# Altium PCB sdp_accelPCB.PcbDoc
Units mil, origin at the board's own origin, x right, y up, seen from the top; angles counter-clockwise.
Board outline 6000 x 4000 mil, 2 copper layers (Top Layer, Bottom Layer); 11 components, 6 nets, 135 pads, 4 vias.
Unrouted connection lines stored in the file: 37.
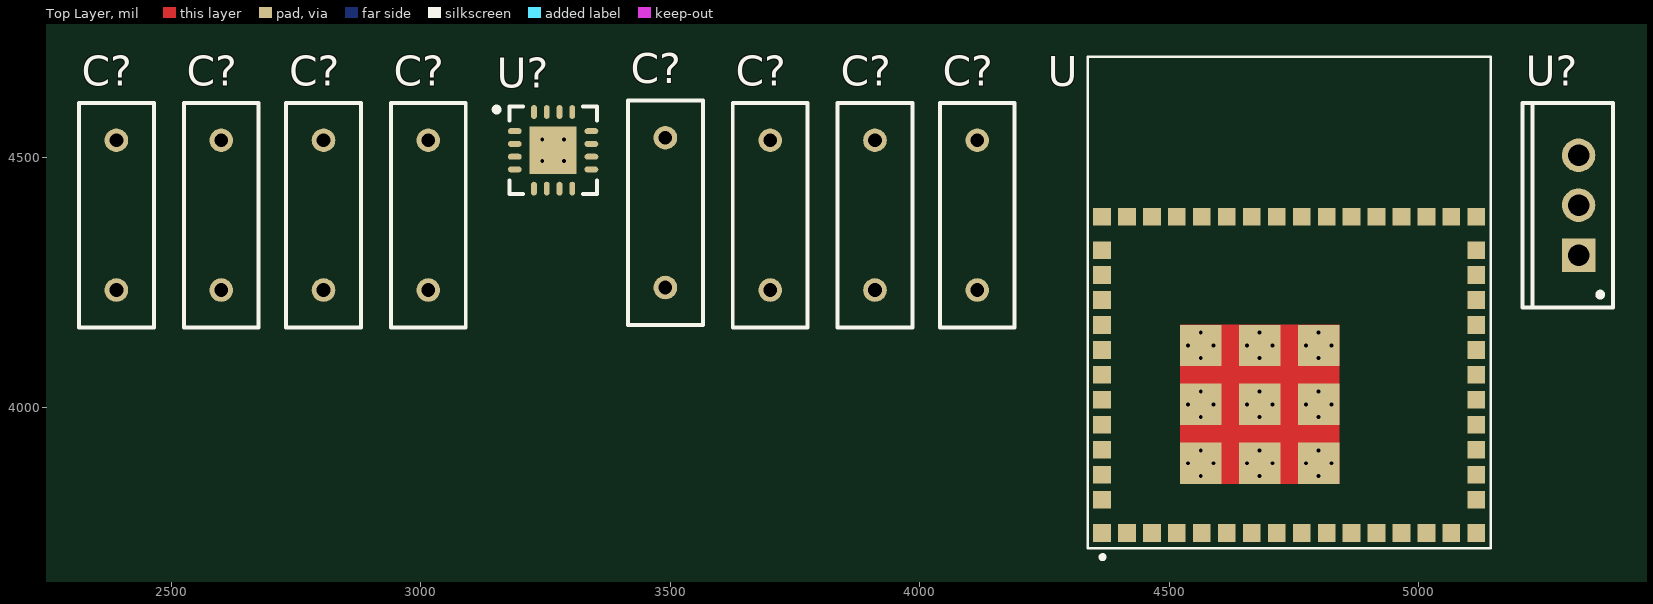
[diagram p0: Top Layer view]
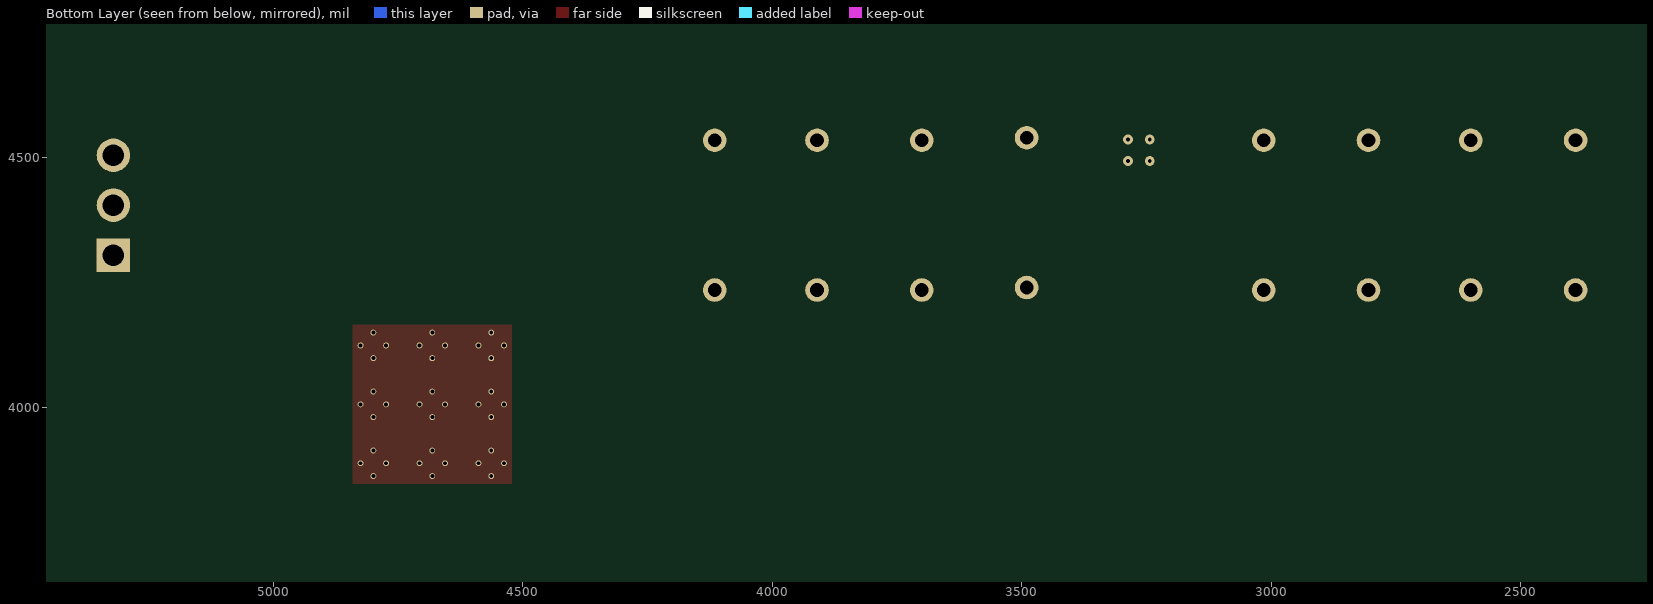
[diagram p1: Bottom Layer view, seen from below]

## Layer stack, top to bottom
Top Solder: solder mask 0.4, Solder Resist, Dk 3.5
Top Layer: signal copper 1.4
Dielectric 1: dielectric 12.6, FR-4, Dk 4.8
Bottom Layer: signal copper 1.4
Bottom Solder: solder mask 0.4, Solder Resist, Dk 3.5

## Board outline
1000,1000 7000,1000 7000,5000 1000,5000

## Design rules (kind name [scope] priority, off if disabled: settings)
Clearance [All] p1: gap=10 ignorepadtopadclearanceinfootprint=FALSE except(0: Arc-Hole Track-Hole SMDPad-Hole THPad-Hole Via-Hole Fill-Hole Poly-Hole Region-Hole Text-Hole)
PolygonConnect [All] p1: connectstyle=Relief reliefconductorwidth=10 reliefentries=4 polygonreliefangle="90 Angle" airgapwidth=10
RoomDefinition sdp_accel [InComponentClass('sdp_accel')] p1: confinementstyle=ConfineIn formatcopy=TRUE lockcomponents=FALSE outline 2305,3685 5400,3685 5400,4720 2305,4720
RoutingVias [All] p1: holewidth=28 width=50 viastyle="Through Hole" minholewidth=28 minwidth=50 maxholewidth=28 maxwidth=50
SolderMaskExpansion [All] p1: expansion=4 istentingtop=FALSE
Width [All] p1: maxlimit=10 minlimit=10 preferedwidth=10
30 further rules are at their usual default settings.

## Classes and differential pairs
component class sdp_accel: C? U U?

## Components (designator, comment, footprint, x,y, rotation, side; value= is the part's Value field where it differs from the comment)
C? "Cap" RAD-0.3 3910,4385 r90 top value=0.1uF
C? "Cap" RAD-0.3 3015,4385 r90 top value=3nF
C? "Cap" RAD-0.3 2600,4385 r90 top value=10nF
C? "Cap" RAD-0.3 3490,4390 r90 top value=100nF
C? "Cap" RAD-0.3 4115,4385 r90 top value=2.2uF
C? "Cap" RAD-0.3 3700,4385 r90 top value=100nF
C? "Cap" RAD-0.3 2390,4385 r90 top value=100nF
C? "Cap" RAD-0.3 2805,4385 r90 top value=3nF
U "CC3220MODASF12MONR" XCVR_CC3220MODASF12MONR 4740,4065 r90 top
U? "LF33ABV" TO220 5320,4405 r90 top
U? "ADXL335BCPZ" ADI-CP-16-14_L 3265,4515 r0 top

## Footprints (in the part's own frame and the unit in brackets; to place one, negate y for a bottom-side part, rotate by r counter-clockwise, add the part's x,y. Pads: shape width x height; smd on the part's side, far side on the other; paste and mask are expansions set on the pad)
ADI-CP-16-14_L [mm] "QFN, 16-Leads, Body 4x4mm, Pitch 0.65mm, Thermal Pad 2.4x2.4mm, IPC High Density"
  oval 0.7x0.3 smd: 1(-1.95,0.975) 2(-1.95,0.325) 3(-1.95,-0.325) 4(-1.95,-0.975) 9(1.95,-0.975) 10(1.95,-0.325) 11(1.95,0.325) 12(1.95,0.975)
  oval 0.3x0.7 smd: 5(-0.975,-1.95) 6(-0.325,-1.95) 7(0.325,-1.95) 8(0.975,-1.95) 13(0.975,1.95) 14(0.325,1.95) 15(-0.325,1.95) 16(-0.975,1.95)
  rect 2.4x2.4 smd: 17(0,0)
  silkscreen extent -3,-2.22 2.22,2.23, body extent -2.08,-2.07 2.07,2.08, height 1.5
RAD-0.3 [mm] "Radial Cap, Thru-Hole; 2 Leads; 0.3 in Pin Spacing"
  round 1.2 hole 0.7: 1(-3.81,0) 2(3.81,0)
  silkscreen extent -5.71,-1.91 5.71,1.91
TO220 [mm] "TO, Thru-Hole, Vertical, Heatsink Mounted; 3 In-Line Leads; Pitch 2.54 mm"
  rect 1.7x1.7 hole 1.1: 1(-2.54,0)
  round 1.7 hole 1.1: 2(0,0) 3(2.54,0)
  silkscreen extent -5.2,-1.75 5.2,2.85, body extent -5.25,-1.8 5.25,2.9, height 19.7
XCVR_CC3220MODASF12MONR [mm]
  rect 0.9x0.9 smd paste-1 mask+0: 1(-8.05,9.525) 2(-8.05,8.255) 3(-8.05,6.985) 4(-8.05,5.715) 5(-8.05,4.445) 6(-8.05,3.175) 7(-8.05,1.905) 8(-8.05,0.635) 9(-8.05,-0.635) 10(-8.05,-1.905) 11(-8.05,-3.175) 12(-8.05,-4.445) 13(-8.05,-5.715) 14(-8.05,-6.985) 15(-8.05,-8.255) 16(-8.05,-9.525) 17(-6.35,-9.524) 18(-5.08,-9.524) 19(-3.81,-9.524) 20(-2.54,-9.524) 21(-1.27,-9.524) 22(0,-9.524) 23(1.27,-9.524) 24(2.54,-9.524) 25(3.81,-9.524) 26(5.08,-9.524) 27(6.35,-9.524) 28(8.05,-9.525) 29(8.05,-8.255) 30(8.05,-6.985) 31(8.05,-5.715) 32(8.05,-4.445) 33(8.05,-3.175) 34(8.05,-1.905) 35(8.05,-0.635) 36(8.05,0.635) 37(8.05,1.905) 38(8.05,3.175) 39(8.05,4.445) 40(8.05,5.715) 41(8.05,6.985) 42(8.05,8.255) 43(8.05,9.525) 44(6.35,9.524) 45(5.08,9.524) 46(3.81,9.524) 47(2.54,9.524) 48(1.27,9.524) 49(0,9.524) 50(-1.27,9.524) 51(-2.54,9.524) 52(-3.81,9.524) 53(-5.08,9.524) 54(-6.35,9.524)
  rect 2.1x2.1 smd paste-2 mask+0: 55(-4.5,4.5) 56(-4.5,1.5) 57(-4.5,-1.5) 58(-1.5,4.5) 59(-1.5,1.5) 60(-1.5,-1.5) 61(1.5,4.5) 62(1.5,1.5) 63(1.5,-1.5)
  round 0.3 hole 0.2 mask+0: 55.1(-4.5,5.15) 55.2(-5.15,4.5) 55.3(-3.85,4.5) 55.4(-4.5,3.85) 56.1(-4.5,2.15) 56.2(-5.15,1.5) 56.3(-3.85,1.5) 56.4(-4.5,0.85) 57.1(-4.5,-0.85) 57.2(-5.15,-1.5) 57.3(-3.85,-1.5) 57.4(-4.5,-2.15) 58.1(-1.5,5.15) 58.2(-2.15,4.5) 58.3(-0.85,4.5) 58.4(-1.5,3.85) 59.1(-1.5,2.15) 59.2(-2.15,1.5) 59.3(-0.85,1.5) 59.4(-1.5,0.85) 60.1(-1.5,-0.85) 60.2(-2.15,-1.5) 60.3(-0.85,-1.5) 60.4(-1.5,-2.15) 61.1(1.5,5.15) 61.2(0.85,4.5) 61.3(2.15,4.5) 61.4(1.5,3.85) 62.1(1.5,2.15) 62.2(0.85,1.5) 62.3(2.15,1.5) 62.4(1.5,0.85) 63.1(1.5,-0.85) 63.2(0.85,-1.5) 63.3(2.15,-1.5) 63.4(1.5,-2.15)
  Top Layer region: 2.55,-2.55 -5.55,-2.55 -5.55,5.55 2.55,5.55
  silkscreen extent -9.38,-10.25 16.18,10.25

## Part data
C? C? C? C? C? C? C? C?: "Capacitor", LatestRevisionDate=17-Jul-2002, LatestRevisionNote="Re-released for DXP Platform.", PackageDescription="Radial Cap, Thru-Hole; 2 Leads; 0.3 in Pin Spacing", PackageReference=RAD-0.3, Published=8-Jun-2000, Publisher="Altium Limited"
U: "IC RF TxRx + MCU WiFi 802.11b/g/n 2.4GHz 63-SMD Module", Package="SMD-63 Texas Instruments", Availability=Unavailable, MF="Texas Instruments", MP=CC3220MODASF12MONR, Price=None, SnapEDA_Link=https://www.snapeda.com/parts/CC3220MODASF12MONR/Texas%20Instruments/view-part/1581700/?ref=snap
U?: library part CMP-0244-00430-1, "500mA, Very Low Drop (0.45V) Voltage Regulator, 3.3V, 3-Pin TO-220", ComponentLink1Description="Manufacturer URL", ComponentLink1URL=http://www.st.com, ComponentLink2Description=Datasheet, ComponentLink2URL=http://www.st.com/internet/com/TECHNICAL_RESOURCES/TECHNICAL_LITERATURE/DATASHEET/CD00000546.pdf, ComponentLink3Description="Package Specification", ComponentLink3URL=http://www.st.com/internet/com/TECHNICAL_RESOURCES/TECHNICAL_LITERATURE/PACKAGE_INFORMATION/CD00004649.pdf, DatasheetVersion=1/11/2010, PackageDescription="TO, Thru-Hole, Vertical, Heatsink Mounted; 3 In-Line Leads; Pitch 2.54 mm", PackageReference=TO220, PackageVersion=ver3.0
U?: library part CMP-0885-00046-1, "Small, Low Power, 3-Axis +/-3 g Accelerometer with Analog Output, 1.6 KHz BW, Industrial, 16-pin QFN, Tray", Manufacturer="Analog Devices", Supply Current="350 uA", Voltage Supply (V)="1.8 to 3.6", # of Axes=3, -3dB Bandwidth="1.6 KHz", Code_JEDEC=MO-220-WGGD, ComponentLink1Description="Manufacturer URL", ComponentLink1URL=http://www.analog.com/en/index.html, ComponentLink2Description=Datasheet, ComponentLink2URL=http://www.analog.com/static/imported-files/data_sheets/ADXL335.pdf, ComponentLink3Description="Package Specification", ComponentLink3URL=http:/www.analog.com/static/imported-files/packages/PKG_PDF/LFCSP(CP)/CP-16/CP_16_14.pdf, ComponentLink4Description="Product URL", ComponentLink4URL=http://www.analog.com/en/mems-sensors/mems-inertial-sensors/adxl335/products/product.html, DatasheetVersion="Rev. B", Mounting Technology="Surface Mount", Output Type=Analog, PackageDescription="16-Pin Lead Frame Chip Scale Package, 4 x 4 mm Body, 0.65 mm Pitch", PackageReference=CP-16-14, PackageVersion="051909-A, 05/2009", Packing=Tray, PartNumber=ADXL335BCPZ, Sensitivity="300 mV/g"

## Via types
v1: diameter 19.68, hole 7.87, Top Layer to Bottom Layer, 4 vias

## Nets (pads, with @x,y where several pads share a name; then routed paths per layer and width w, separated by ;. In a path a pad name is that pad's centre, name@x,y a point inside that pad or via, vN(x,y) a via of type N, cw(c..) or ccw(c..) an arc to the next point about the centre after c; other vN are vias at no path point)
+5: C?.2@3910,4535 U?.1@5320,4305
ADC0: C?.2@2805,4535 U.46 U?.12
ADC1: C?.2@3015,4535 U.47 U?.10
ADC2: C?.2@2600,4535 U.48 U?.8
GND: C?.1 U.1 U.2 U.16 U.27 U.28 U.30 U.32 U.38 U.43 U.55 U.55.1 U.55.2 U.55.3 U.55.4 U.56 U.56.1 U.56.2 U.56.3 U.56.4 U.57 U.57.1 U.57.2 U.57.3 U.57.4 U.58 U.58.1 U.58.2 U.58.3 U.58.4 U.59 U.59.1 U.59.2 U.59.3 U.59.4 U.60 U.60.1 U.60.2 U.60.3 U.60.4 U.61 U.61.1 U.61.2 U.61.3 U.61.4 U.62 U.62.1 U.62.2 U.62.3 U.62.4 U.63 U.63.1 U.63.2 U.63.3 U.63.4 U?.2@5320,4405 U?.3@3188.23,4502.2 U?.5 U?.6 U?.7
V_Bat: C?.2@2390,4535 C?.2@3490,4540 C?.2@3700,4535 C?.2@4115,4535 U.37 U.40 U?.3@5320,4505 U?.14 U?.15
pads on no net: U.3 U.4 U.5 U.6 U.7 U.8 U.9 U.10 U.11 U.12 U.13 U.14 U.15 U.17 U.18 U.19 U.20 U.21 U.22 U.23 U.24 U.25 U.26 U.29 U.31 U.33 U.34 U.35 U.36 U.39 U.41 U.42 U.44 U.45 U.49 U.50 U.51 U.52 U.53 U.54 U?.1@3188.23,4553.39 U?.2@3188.23,4527.8 U?.4 U?.9 U?.11 U?.13 U?.16 U?.17
copper on no net:
  other v1: 3243.35,4493.35 3286.65,4493.35 3243.35,4536.65 3286.65,4536.65